# Altium PCB HANDS_FREE_ControlUnit_V1.PcbDoc (part 1 of 3)
Units mil, origin at the board's own origin, x right, y up, seen from the top; angles counter-clockwise.
Board outline 2372.03 x 3554.03 mil, 2 copper layers (Top Layer, Bottom Layer); 33 components, 66 nets, 337 pads, 84 vias.
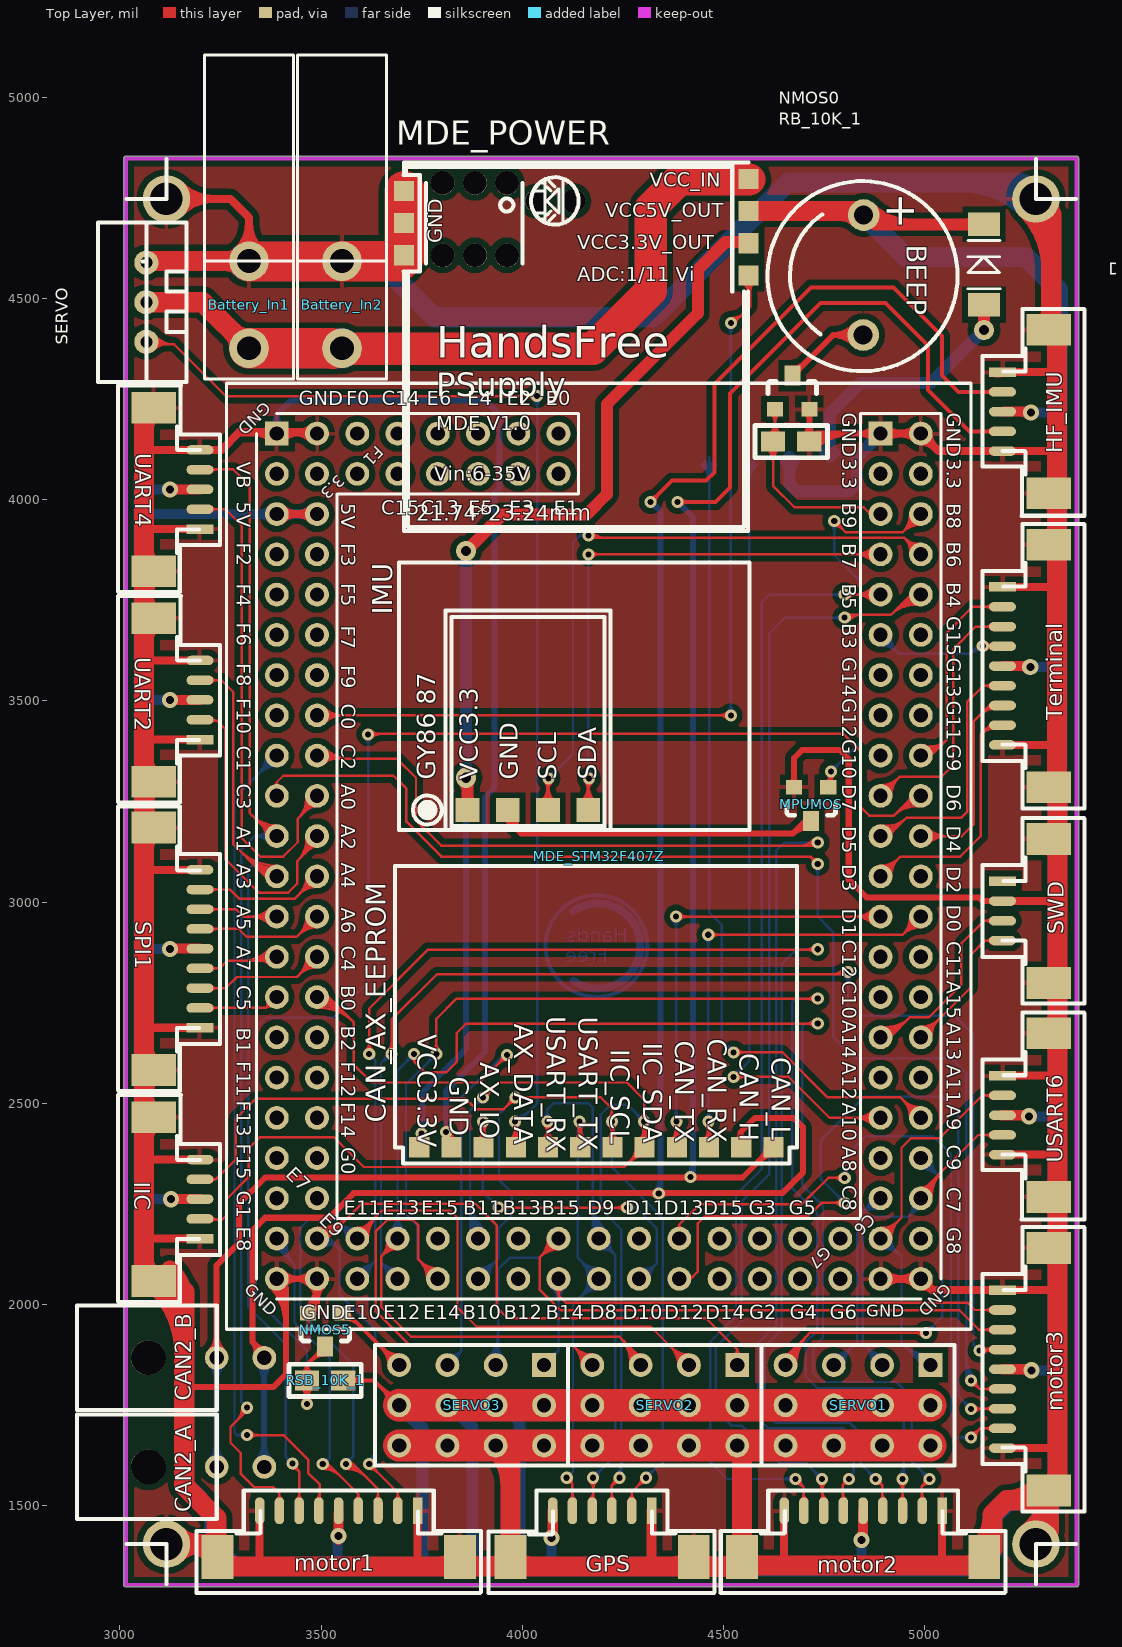
[diagram p0: Top Layer view]
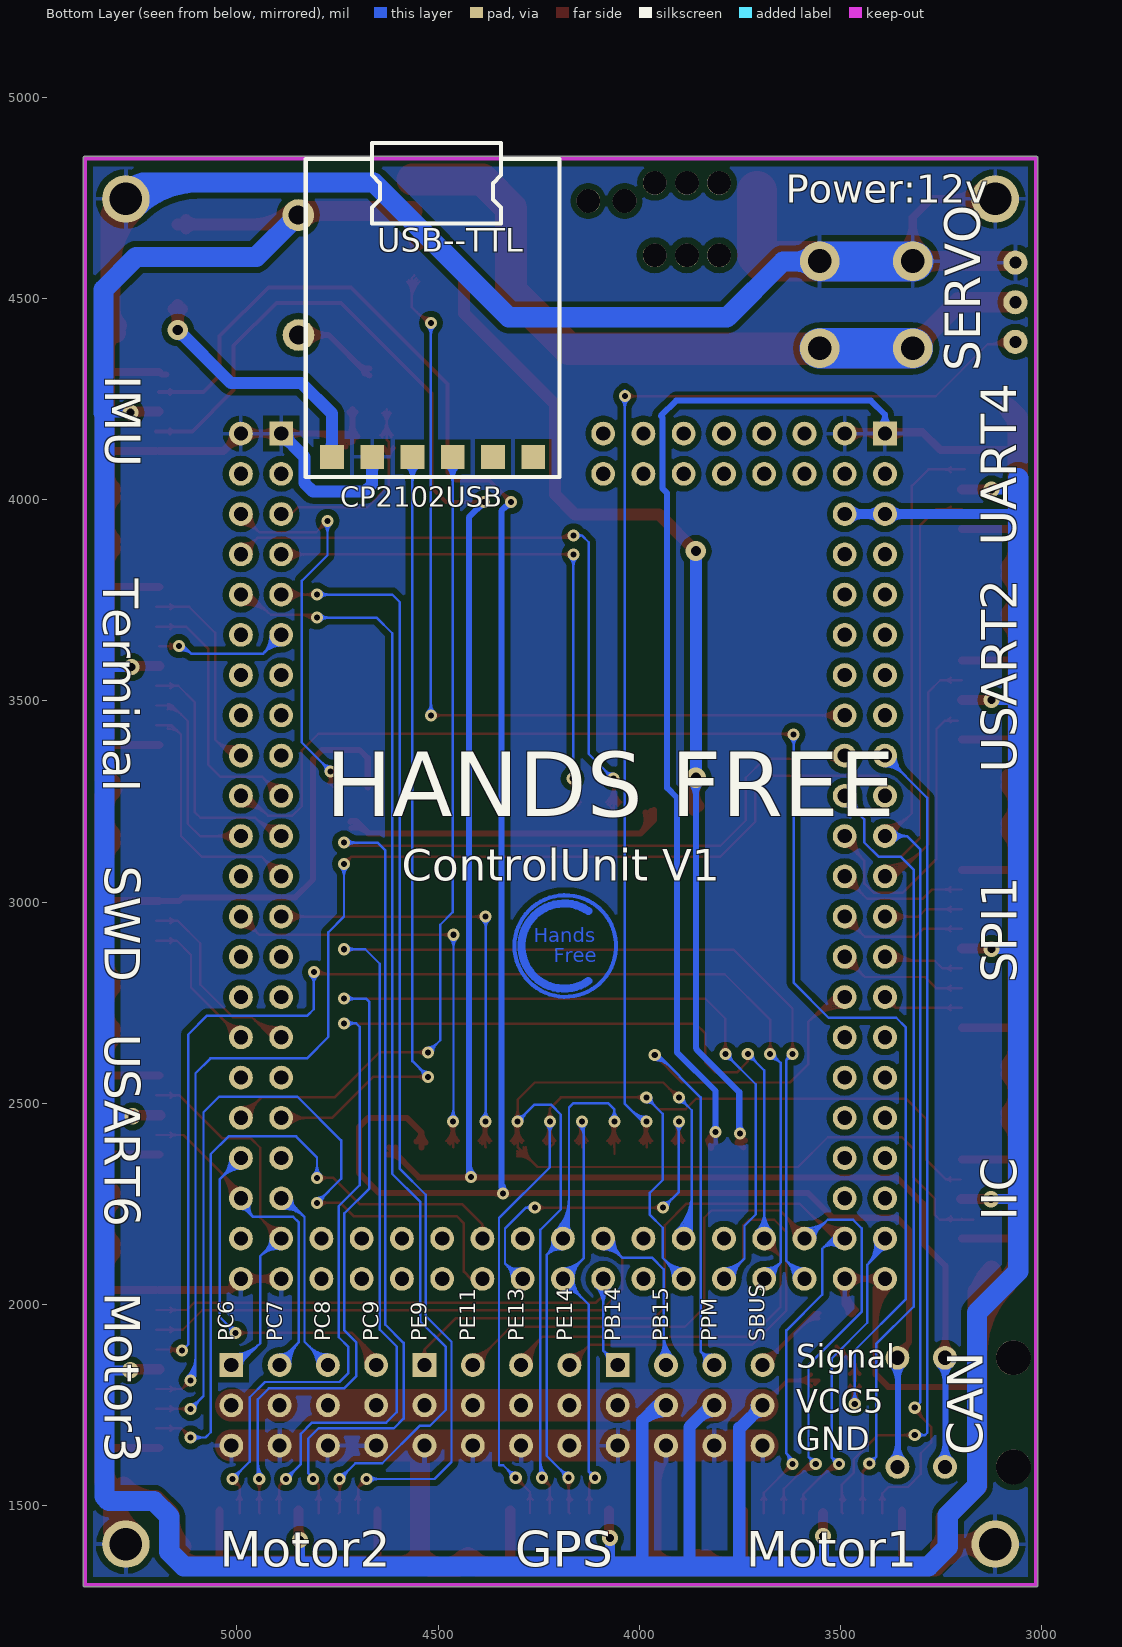
[diagram p1: Bottom Layer view, seen from below]

## Layer stack, top to bottom
Top Layer: signal copper 1.4
Dielectric: dielectric 12.6, FR-4, Dk 4.8
Bottom Layer: signal copper 1.4

## Board outline
3009.99,1304 3009.99,4845 cw(c3015,4845) 3010.21,4846.5 cw(c3015,4848) 3015,4853.02 5377,4853.02 cw(c5377,4848) 5382.02,4848 5382.02,1304 cw(c5377,1304) 5377,1298.98 3015,1298.98 cw(c3015,1304)

## Design rules (kind name [scope] priority, off if disabled: settings)
Clearance [All] p1: gap=8
ComponentClearance [All] p1 off: gap=10 collisioncheckmode=3 verticalgap=10 showdistances=FALSE
Height [All] p1 off: minheight=0 maxheight=1000 prefheight=500
PolygonConnect [All] p1: connectstyle=Relief reliefconductorwidth=10 reliefentries=4 polygonreliefangle="90 Angle"
RoutingVias [All] p1: holewidth=15 width=30 viastyle="Through Hole" minholewidth=15 minwidth=30 maxholewidth=100 maxwidth=200
SilkscreenOverComponentPads [All] p1: minsilkscreentomaskgap=10
SolderMaskExpansion [All] p1: expansion=4
Width [All] p1: maxlimit=100 minlimit=6 preferedwidth=6
25 further rules are at their usual default settings.

## Components (designator, comment, footprint, x,y, rotation, side; value= is the part's Value field where it differs from the comment)
Battery_In1 "HDR_Header_Power_2P" HDR_MOLEX_POWER5557_DH_2P 3321,4376 r90 top
Battery_In2 "HDR_Header_Power_2P" HDR_MOLEX_POWER5557_DH_2P 3552,4376 r90 top
BEEP "ELE_蜂鸣器12*X" ELE_蜂鸣器_D_12*X 4846,4558 r270 top
CAN2_A "HDR_HEADER_CAN_DH_2P" HDR_MOLEX_CANMX3.0_DH_2P 3359,1597 r180 top
CAN2_B "HDR_HEADER_CAN_DH_2P" HDR_MOLEX_CANMX3.0_DH_2P 3359,1868 r180 top
CAN_AX_EEPROM "MDE_CAN_AX_EEPROM" MDE_CAN_AX_EEPROM 4184,2751 r0 top
"ControlUnit V1" "LOGO" LOGO 4308,2906 r180 bottom (schematic designator ControlUnit)
CP2102USB "MDE_CP2102-TTLUSB" MDE_CP2102-TTLUSB_BASE 4264,4106 r270 bottom
D1 "1N4148" ELE_D1206 5247,4484 r90 top
GPS "HANDS_FREE_GPS" HDR_Molex_PH_1.25_6P 4321,1488 r180 top
HF_IMU "HANDS_FREE_IMU" HDR_Molex_PH_1.25_5P 5193,4317 r270 top
IIC "HANDS_FREE_IIC" HDR_Molex_PH_1.25_5P 3199,2164 r90 top
IMU "MDE_GY86_87" MDE_GY86_GY87_BASE 3694,3179 r90 top
MDE_POWER "MDE_POWERSupply_5.0V_3.3V" MDE_POWERSupply_5.0V_3.3V 3696,3922 r0 top
MDE_STM32F407Z "MDE_UNIT3-CORE_STM32F407ZG" MDE_UNIT3-CORE_STM32F407ZG 4190,3114.14 r270 top
motor1 "*MOTOR" HDR_Molex_PH_1.25_9P 3740,1488 r180 top
motor2 "*MOTOR" HDR_Molex_PH_1.25_9P 5043,1488 r180 top
motor3 "*MOTOR" HDR_Molex_PH_1.25_9P 5193,2036 r270 top
MPUMOS "SIS412DN" CHP_SOT23_P_3P 4760,3285 r180 top
NMOS0 "SIS412DN" CHP_SOT23_P_3P 4628,4225 r0 top
NMOS5 "SIS412DN" CHP_SOT23_P_3P 3553,1979 r180 top
RB_10K_1 "ELE_RES_1" ELE_0805_P 4713,4144 r180 top
RSB_10K_1 "ELE_RES_1" ELE_0805_P 3465.06,1812 r0 top
SERVO "HDR_Header_1*3" HDR_数字舵机接口_D 3066,4392 r180 top
SERVO1 "HDR_Header_4*3" HDR_Header_3.00_DV_3*4 5014,1850 r180 top
SERVO2 "HDR_Header_4*3" HDR_Header_3.00_DV_3*4 4534,1850 r180 top
SERVO3 "HDR_Header_4*3" HDR_Header_3.00_DV_3*4 4054,1850 r180 top
SPI1 "HANDS_FREE_SPI" HDR_Molex_PH_1.25_9P 3199,2688 r90 top
SWD "HANDS_FREE_SWD" HDR_Molex_PH_1.25_4P 5193,3052 r270 top
Terminal "HANDS_FREE_TERMINAL" HDR_Molex_PH_1.25_9P 5193,3783 r270 top
UART2 "HANDS_FREE_USART" HDR_Molex_PH_1.25_5P 3199,3404 r90 top
UART4 "HANDS_FREE_USART" HDR_Molex_PH_1.25_5P 3199,3927 r90 top
USART6 "HANDS_FREE_USART" HDR_Molex_PH_1.25_5P 5193,2569 r270 top

## Footprints (in the part's own frame and the unit in brackets; to place one, negate y for a bottom-side part, rotate by r counter-clockwise, add the part's x,y. Pads: shape width x height; smd on the part's side, far side on the other; paste and mask are expansions set on the pad)
CHP_SOT23_P_3P [mil]
  rect 40x36 smd: 1(0,0) 2(85,0)
  rect 40x50 smd: 3(43,83)
  silkscreen extent -18,39 103,69
ELE_0805_P [mil]
  rect 60x50 smd: 1(0,0) 2(90,0)
  silkscreen extent -45,-40 135,40
ELE_D1206 [mm]
  rect 1.5x2 smd: 1(0,2.54) 2(5.08,2.54)
  silkscreen extent 1.02,1.52 4.06,3.56
ELE_蜂鸣器_D_12*X [mm]
  round 2 hole 1.2: 1(-3.785,0.051) 2(3.785,0.025)
  silkscreen extent -5.93,-6.02 6.07,5.97
HDR_Header_3.00_DV_3*4 [mm] "Connector; Header; 10x2 Position"
  rect 1.5x1.5 hole 0.9: 1(0,0)
  round 1.5 hole 0.9: 2(0,2.54) 3(0,5.08) 4(3.048,0) 5(3.048,2.54) 6(3.048,5.08) 7(6.096,0) 8(6.096,2.54) 9(6.096,5.08) 10(9.144,0) 11(9.144,2.54) 12(9.144,5.08)
  silkscreen extent -1.52,-1.27 10.67,6.35
HDR_MOLEX_CANMX3.0_DH_2P [mm]
  round 1.5 hole 0.9: 1(0,0) 2(3,0)
  round 2.2 hole 2.2: 3(7.315,0)
  silkscreen extent 3,-3.3 11.81,3.3
HDR_Molex_PH_1.25_4P [mm]
  rect 0.6x1.7 smd: 1(0,0)
  oval 0.6x1.7 smd: 2(1.25,0) 3(2.5,0) 4(3.745,0)
  rect 2x2.8 smd: 5(-2.667,2.921) 6(6.417,2.921)
  silkscreen extent -3.99,-1.27 7.72,5.18
HDR_Molex_PH_1.25_5P [mm]
  rect 0.6x1.7 smd: 1(0,0)
  oval 0.6x1.7 smd: 2(1.25,0) 3(2.5,0) 4(3.745,0) 5(4.989,0)
  rect 2x2.8 smd: 6(-2.667,2.921) 7(7.656,2.921)
  silkscreen extent -3.99,-1.27 9.07,5.18
HDR_Molex_PH_1.25_6P [mm]
  rect 0.6x1.7 smd: 1(0,0)
  oval 0.6x1.7 smd: 2(1.25,0) 3(2.5,0) 4(3.745,0) 5(4.989,0) 6(6.234,0)
  rect 2x2.8 smd: 7(-2.667,2.921) 8(8.901,2.921)
  silkscreen extent -3.99,-1.27 10.29,5.18
HDR_Molex_PH_1.25_9P [mm]
  rect 0.6x1.7 smd: 1(0,0)
  oval 0.6x1.7 smd: 2(1.25,0) 3(2.5,0) 4(3.745,0) 5(4.989,0) 6(6.234,0) 7(7.478,0) 8(8.723,0) 9(9.968,0)
  rect 2x2.8 smd: 10(-2.667,2.921) 11(12.635,2.921)
  silkscreen extent -3.99,-1.27 13.97,5.18
HDR_MOLEX_POWER5557_DH_2P [mm]
  round 2.5 hole 1.5: 1(0,0) 2(5.5,0)
  silkscreen extent -1.95,-2.8 18.5,2.8
HDR_数字舵机接口_D [mil]
  round 60 hole 30: 1(0,0) 2(0,-98.43) 3(0,-196.85)
  silkscreen extent -100,-297 120,100
LOGO [mil]
  Top Layer circle w10: c123.81,-15 r126.19
  Top Layer lines w20: 181.29,71.7 ccw(c120.7,-15.05) 180.87,-102.09
MDE_CAN_AX_EEPROM [mil]
  rect 50x50 smd: 1(440,-360) 2(360,-360) 3(280,-360) 4(200,-360) 5(120,-360) 6(40,-360) 7(-40,-360) 8(-120,-360) 9(-200,-360) 10(-280,-360) 11(-360,-360) 12(-440,-360)
  silkscreen extent -500,-400 498,339
MDE_CP2102-TTLUSB_BASE [mil]
  rect 59x59 smd: 1(0,0) 2(0,-100) 3(0,-200) 4(0,-300) 5(0,-400) 6(0,-500)
  silkscreen extent -780,-565 50,65
MDE_GY86_GY87_BASE [mil]
  rect 59x59 smd: 1(50,-170) 2(50,-270) 3(50,-370) 4(50,-470)
  silkscreen extent 0,-870 665,0
MDE_POWERSupply_5.0V_3.3V [mil]
  round 59.06 hole 59.06: 0(106,685) 0(106,865) 0(186,685) 0(186,865) 0(266,685) 0(266,865) 0(341,820) 0(431,820)
  rect 50x50 smd: 1(866,875) 2(866,795) 3(866,715) 4(866,635) 5(10,685) 5(10,765) 5(10,845)
  silkscreen extent 9,0 866,915
MDE_UNIT3-CORE_STM32F407ZG [mm]
  round 1.5 hole 0.9: 1(-26.67,-5.08) 2(-24.13,-5.08) 3(-26.67,-7.62) 4(-24.13,-7.62) 5(-26.67,-10.16) 6(-24.13,-20.32) 7(-24.13,-10.16) 8(-26.67,-12.7) 9(-24.13,-12.7) 10(-26.67,-15.24) 11(-24.13,-15.24) 12(-19.05,-20.32) 13(-19.05,-17.78) 14(-16.51,-20.32) 15(-16.51,-17.78) 18(-13.97,-20.32) 19(-13.97,-17.78) 20(-11.43,-20.32) 21(-11.43,-17.78) 22(-8.89,-20.32) 26(-8.89,-17.78) 27(-6.35,-20.32) 28(-6.35,-17.78) 29(-3.81,-20.32) 34(-3.81,-17.78) 35(-1.27,-20.32) 36(-1.27,-17.78) 37(1.27,-20.32) 40(1.27,-17.78) 41(3.81,-20.32) 42(3.81,-17.78) 43(6.35,-20.32) 44(6.35,-17.78) 45(8.89,-20.32) 46(8.89,-17.78) 47(11.43,-20.32) 48(11.43,-17.78) 49(13.97,-20.32) 50(13.97,-17.78) 53(16.51,-20.32) 54(16.51,-17.78) 55(19.05,-20.32) 56(19.05,-17.78) 57(21.59,-20.32) 58(21.59,-17.78) 59(24.13,-20.32) 60(24.13,-17.78) 63(26.67,-15.24) 64(24.13,-15.24) 65(26.67,-12.7) 66(24.13,-12.7) 67(26.67,-10.16) 68(24.13,-10.16) 69(26.67,-7.62) 70(24.13,-7.62) 73(26.67,-5.08) 74(24.13,-5.08) 75(26.67,-2.54) 76(24.13,-2.54) 77(26.67,0) 78(24.13,0) 79(26.67,2.54) 80(24.13,2.54) 81(26.67,5.08) 82(24.13,5.08) 85(26.67,7.62) 86(24.13,7.62) 87(26.67,10.16) 88(24.13,10.16) 89(26.67,12.7) 90(24.13,12.7) 91(26.67,15.24) 92(24.13,15.24) 93(24.13,20.32) 96(24.13,17.78) 97(21.59,20.32) 98(21.59,17.78) 99(19.05,20.32) 100(19.05,17.78) 101(16.51,20.32) 102(16.51,17.78) 103(13.97,20.32) 104(13.97,17.78) 105(11.43,20.32) 109(11.43,17.78) 110(8.89,20.32) 111(8.89,17.78) 112(6.35,20.32) 113(6.35,17.78) 114(3.81,20.32) 115(3.81,17.78) 116(1.27,20.32) 117(1.27,17.78) 118(-1.27,20.32) 119(-1.27,17.78) 122(-3.81,20.32) 123(-3.81,17.78) 124(-6.35,20.32) 125(-6.35,17.78) 126(-8.89,20.32) 127(-8.89,17.78) 128(-11.43,20.32) 129(-11.43,17.78) 132(-13.97,20.32) 133(-13.97,17.78) 134(-16.51,20.32) 135(-16.51,17.78) 136(-19.05,20.32) 137(-19.05,17.78) 139(-21.59,20.32) 140(-21.59,17.78) 141(-26.67,-2.54) 142(-24.13,-2.54) 200(-21.59,-17.78) 201(-21.59,-20.32) 202(-24.13,20.32) 203(-24.13,17.78) 206(-26.67,-17.78) 207(-24.13,-17.78) 210(26.67,-20.32) 211(26.67,-17.78) 212(26.67,17.78) 213(26.67,20.32) 214(-26.67,20.32)
  rect 1.5x1.5 hole 0.9: 208(-26.67,-20.32) 215(-26.67,17.78)
  silkscreen extent -29.85,-23.5 29.85,23.5

## Part data
BEEP: library part E
CP2102USB: "CP2102Ä£¿é£"
D1: library part ELE_Diode, "二?"
IMU: "IMUģ?"
motor1 motor2 motor3: library part HANDS_FREE_MOTOR
MPUMOS NMOS0 NMOS5: library part ELE_NMOS_1, "MOS管"
RB_10K_1 RSB_10K_1: "电?"

## Free pads (board coordinates)
  round 118.11 hole 80.71: 1(3116,4747) 2(5276,4747) 3(5276,1405) 4(3116,1405)

## Via types
v1: diameter 30, hole 15, Top Layer to Bottom Layer, 70 vias
v2: diameter 40, hole 20, Top Layer to Bottom Layer, 11 vias
v3: diameter 50, hole 25, Top Layer to Bottom Layer, 3 vias

## Nets (pads, with @x,y where several pads share a name; then routed paths per layer and width w, separated by ;. In a path a pad name is that pad's centre, name@x,y a point inside that pad or via, vN(x,y) a via of type N, cw(c..) or ccw(c..) an arc to the next point about the centre after c; other vN are vias at no path point)
ADC_IN_POWER: MDE_POWER.4 MDE_STM32F407Z.26 | length 2771.3
  Top Layer w6: MDE_STM32F407Z.26@3490,3464.14 4516.14,3464.14 v1@4518,3466 ; MDE_STM32F407Z.26@3500.27,3453.87 cw(c3525.07,3429.07) 3525.07,3464.14 cw(c3525.07,3499.21) MDE_STM32F407Z.26@3500.27,3474.41 ; MDE_STM32F407Z.26@3504.52,3449.62 cw(c3539.56,3414.58) 3539.56,3464.14 cw(c3539.56,3513.7) MDE_STM32F407Z.26@3504.52,3478.65 ; MDE_STM32F407Z.26@3508.76,3445.38 cw(c3554.04,3400.09) 3554.04,3464.14 cw(c3554.04,3528.18) MDE_STM32F407Z.26@3508.76,3482.9 ; 4488.7,3464.14 cw(c4488.7,3434.7) v1@4509.51,3455.51 ; 4489.36,3464.14 ccw(c4489.36,3492.64) v1@4509.51,3472.49 ; v1@4518,4431 4566,4479 4566,4550 MDE_POWER.4@4559,4557 ; v1@4518,4445 ccw(c4518,4478.8) 4541.9,4454.9 ; v1@4518,4451 ccw(c4518,4499.28) 4552.14,4465.14 ; v1@4530,4439 cw(c4539.66,4439) 4532.83,4445.83 ; MDE_POWER.4@4546.44,4541.44 cw(c4499.23,4494.23) 4566,4494.23 ; MDE_POWER.4@4550.69,4545.69 cw(c4513.72,4508.72) 4566,4508.72 ; MDE_POWER.4@4554.93,4549.93 cw(c4528.2,4523.2) 4566,4523.2 ; 4566,4513.54 cw(c4605.46,4513.54) MDE_POWER.4@4577.56,4541.44 ; 4566,4528.03 cw(c4590.97,4528.03) MDE_POWER.4@4573.31,4545.69
  Bottom Layer w6: v1@4509.51,3472.49 ccw(c4489.03,3492.97) 4518,3492.97 ccw(c4546.97,3492.97) v1@4526.49,3472.49 ; v1@4509.51,4430.51 cw(c4489.03,4410.03) 4518,4410.03 cw(c4546.97,4410.03) v1@4526.49,4430.51 ; v1@4516,3462 v1(4518,3464) v1(4518,4439)
AX_DATA: CAN_AX_EEPROM.9 SERVO.1 | length 3628.6
  Top Layer w6: SERVO.1@3060,4386 3135,4386 ; SERVO.1@3073.01,4397.65 ccw(c3097.36,4417.29) 3097.36,4386 ; SERVO.1@3077.68,4401.41 ccw(c3109.91,4427.4) 3109.91,4386 ; SERVO.1@3080.85,4377.15 cw(c3102.21,4355.79) 3102.21,4386 ; SERVO.1@3082.35,4405.18 ccw(c3122.45,4437.52) 3122.45,4386 ; SERVO.1@3085.09,4372.91 cw(c3116.7,4341.3) 3116.7,4386 ; SERVO.1@3087.02,4408.95 ccw(c3135,4447.63) 3135,4386 ; CAN_AX_EEPROM.9@3968.44,2406.56 ccw(c3935.37,2439.63) 3982.14,2439.63 ; CAN_AX_EEPROM.9@3972.69,2402.31 ccw(c3949.86,2425.14) 3982.14,2425.14 ; v1@3973.66,2446.51 cw(c3953.17,2426.03) 3982.14,2426.03 cw(c4011.11,2426.03) v1@3990.63,2446.51 ; v1@3975.77,2444.83 cw(c3962.99,2424.43) 3986.46,2429.82 ; CAN_AX_EEPROM.9@3982,2391 3982.14,2391.14 v1(3982.14,2455) ; 3982.14,2419.63 ccw(c4012.63,2419.63) CAN_AX_EEPROM.9@3991.07,2398.07 ; 3982.14,2434.11 ccw(c4027.11,2434.11) CAN_AX_EEPROM.9@3995.31,2402.31 ; v1@3982.14,2448.6 ccw(c4041.6,2448.6) CAN_AX_EEPROM.9@3999.56,2406.56 ; 3984.45,2438.55 cw(c4000.17,2442.16) v1@3987.03,2451.52 ; 3987.44,2425.54 cw(c4014.73,2431.8) v1@3991.92,2448.04 ; v1@4027.51,4248.51 ccw(c4007.03,4228.03) 4007.03,4257 ccw(c4007.03,4285.97) v1@4027.51,4265.49 ; v1(4036,4257) 3264,4257 3135,4386
  Bottom Layer w6: v1@3982.14,2461 ccw(c3982.14,2499.28) 4009.21,2472.21 ; v1@3982.14,2467 ccw(c3982.14,2519.77) 4019.46,2482.46 ; 3998.97,2461.97 cw(c3982.14,2478.8) v1(3982.14,2455) 3992,2455 4037,2500 4037,4272 ; v1@4027.51,4248.51 cw(c4004.62,4225.62) 4037,4225.62 ; v1@4031.76,4252.76 cw(c4019.1,4240.1) 4037,4240.1 ; 4037,4230.44 cw(c4062.56,4230.44) v1@4044.49,4248.51
AX_IO: CAN_AX_EEPROM.10 MDE_STM32F407Z.79 | length 1506.9
  Top Layer w6: CAN_AX_EEPROM.10@3888.44,2406.56 ccw(c3855.72,2439.28) 3902,2439.28 ; CAN_AX_EEPROM.10@3892.69,2402.31 ccw(c3870.2,2424.8) 3902,2424.8 ; v1@3893.51,2446.51 cw(c3873.03,2426.03) 3902,2426.03 cw(c3930.97,2426.03) v1@3910.49,2446.51 ; v1@3895.64,2444.82 cw(c3882.75,2424.2) 3906.45,2429.67 ; CAN_AX_EEPROM.10@3902,2391 v1(3902,2455) ; 3902,2419.97 ccw(c3932.97,2419.97) CAN_AX_EEPROM.10@3911.07,2398.07 ; 3902,2434.46 ccw(c3947.46,2434.46) CAN_AX_EEPROM.10@3915.31,2402.31 ; v1@3902,2448.94 ccw(c3961.94,2448.94) CAN_AX_EEPROM.10@3919.56,2406.56 ; 3904.4,2438.55 cw(c3920.31,2442.22) v1@3906.92,2451.57 ; 3907.44,2425.39 cw(c3935.23,2431.81) v1@3911.84,2448.13 ; v1(3941,2241) v1(4260,2241) ; v1@3949.49,2232.51 cw(c3969.97,2212.03) 3969.97,2241 cw(c3969.97,2269.97) v1@3949.49,2249.49 ; v1@4251.51,2232.51 ccw(c4231.03,2212.03) 4231.03,2241 ccw(c4231.03,2269.97) v1@4251.51,2249.49
  Bottom Layer w6: v1@3893.51,2446.51 cw(c3873.03,2426.03) 3902,2426.03 cw(c3930.97,2426.03) v1@3910.49,2446.51 ; v1(3902,2455) 3902,2280 v1(3941,2241) ; v1@3929,2241 ccw(c3900.03,2241) 3920.51,2261.49 ccw(c3941,2281.97) v1@3941,2253 ; v1(4260,2241) 4282,2241 ; v1@4270.09,2234.5 cw(c4282,2226.84) 4282,2241 ; v1@4270.09,2247.5 ccw(c4282,2255.16) 4282,2241 ; MDE_STM32F407Z.79@4290,2064.14 4296.14,2064.14 4334,2102 ; MDE_STM32F407Z.79@4292.81,2078.39 ccw(c4298.23,2105.94) 4318.09,2086.09 ; MDE_STM32F407Z.79@4293.97,2084.28 ccw(c4300.85,2119.23) 4326.04,2094.04 ; MDE_STM32F407Z.79@4295.13,2090.17 ccw(c4303.47,2132.53) 4334,2102 ; MDE_STM32F407Z.79@4310.53,2064.14 cw(c4345.27,2064.14) 4320.7,2088.7 ; MDE_STM32F407Z.79@4316.53,2064.14 cw(c4365.75,2064.14) 4330.95,2098.95 ; 4282,2241 4334,2189 4334,2102
BEEP: MDE_STM32F407Z.140 NMOS0.1 RB_10K_1.2 | length 894.9
  Top Layer w6: RB_10K_1.2@4607.44,4128.44 cw(c4569.89,4090.89) 4623,4090.89 cw(c4676.11,4090.89) RB_10K_1.2@4638.56,4128.44 ; RB_10K_1.2@4611.69,4132.69 cw(c4584.37,4105.37) 4623,4105.37 cw(c4661.63,4105.37) RB_10K_1.2@4634.31,4132.69 ; RB_10K_1.2@4612.44,4159.56 ccw(c4574.89,4197.11) 4628,4197.11 ccw(c4681.11,4197.11) RB_10K_1.2@4643.56,4159.56 ; RB_10K_1.2@4616.69,4155.31 ccw(c4589.37,4182.63) 4628,4182.63 ccw(c4666.63,4182.63) RB_10K_1.2@4639.31,4155.31 ; NMOS0.1@4617.39,4214.39 cw(c4591.79,4188.79) 4628,4188.79 cw(c4664.21,4188.79) NMOS0.1@4638.61,4214.39 ; NMOS0.1@4621.64,4218.64 cw(c4606.27,4203.27) 4628,4203.27 cw(c4649.73,4203.27) NMOS0.1@4634.36,4218.64 ; NMOS0.1@4628,4225 4628,4149 RB_10K_1.2@4623,4144 4623,4034 4676,3981 4848,3981 4864.86,3964.14 MDE_STM32F407Z.140@4890,3964.14
  Bottom Layer w6: MDE_STM32F407Z.140@4871.14,3983 MDE_STM32F407Z.140@4890,3964.14
CAN1_H: CAN2_A.1 CAN2_B.1 CAN_AX_EEPROM.2 HF_IMU.2 | length 5949.3
  Top Layer w10: v1(4319,3994) 4372,4047 4456,4047 4477,4068 4477,4287 4717,4527 4922,4527 5043,4406 5043,4308 5083.21,4267.79 HF_IMU.2@5193,4267.79 ; v1@4319,4004 ccw(c4319,4028.14) 4336.07,4011.07 ccw(c4353.14,3994) v1@4329,3994 ; HF_IMU.2@5166.53,4262.97 ccw(c5154.9,4251.34) 5154.9,4267.79 ccw(c5154.9,4284.23) HF_IMU.2@5166.53,4272.6
  Top Layer w15: CAN2_B.1@3337.98,1874.57 ccw(c3307.2,1884.2) 3330,1907 ; 3338.47,1898.53 ccw(c3359,1919.06) CAN2_B.1@3359,1890.03 ; CAN2_B.1@3358,1879 3330,1907 ; 4318.48,2277 cw(c4318.48,2255.48) v1@4333.7,2270.7 ; 4323.31,2277 ccw(c4323.31,2291.69) v1@4333.7,2281.3 ; v1@4344.3,2270.7 cw(c4359.52,2255.48) 4359.52,2277 ; v1@4344.3,2281.3 ccw(c4354.69,2291.69) 4354.69,2277 ; CAN_AX_EEPROM.2@4531.73,2403.47 ccw(c4507.59,2428) 4542,2428 ; CAN_AX_EEPROM.2@4542,2391 4542,2428 ; CAN_AX_EEPROM.2@4553.89,2405.44 cw(c4569.35,2428) 4542,2428 ; 3330,1907 3330,2185 3361,2216 3520,2216 3581,2277 4646,2277 4697,2328 4697,2441 4674,2464 4578,2464 4542,2428
  Bottom Layer w15: CAN2_A.1@3343.42,1612.58 ccw(c3308.24,1647.76) 3358,1647.76 ; CAN2_B.1@3343.42,1852.42 cw(c3308.24,1817.24) 3358,1817.24 ; CAN2_A.1@3358,1608 CAN2_B.1@3358,1879 ; 3358,1652.59 ccw(c3414.59,1652.59) CAN2_A.1@3374.58,1612.58 ; 3358,1812.41 cw(c3414.59,1812.41) CAN2_B.1@3374.58,1852.42 ; v1@4319,3986.5 cw(c4319,3963.57) 4335.22,3979.78 ; v1@4319,3996 4343,3972 4343,2297 ; v1@4333.7,2281.3 ccw(c4311.24,2303.76) 4343,2303.76 ; v1@4333.94,2281.54 ccw(c4323.49,2293) 4339,2293 ; v1@4334.96,2282.32 ccw(c4325.58,2297) 4343,2297 ; v1(4339,2276) 4339,2293 ; v1@4344.06,2281.54 cw(c4354.51,2293) 4339,2293 ; 4339,2293 4343,2297
CAN1_L: CAN2_A.2 CAN2_B.2 CAN_AX_EEPROM.1 HF_IMU.4 | length 5596.3
  Top Layer w10: v1(4386,3994) 4480,3994 4516,4030 4516,4264 4741,4489 4902,4489 5008,4383 5008,4272 5110.43,4169.57 HF_IMU.4@5201,4169.57 ; v1@4393.07,3986.93 cw(c4410.14,3969.86) 4410.14,3994 cw(c4410.14,4018.14) v1@4393.07,4001.07 ; HF_IMU.4@5166.53,4164.76 ccw(c5154.9,4153.13) 5154.9,4169.57 ccw(c5154.9,4186.02) HF_IMU.4@5166.53,4174.39
  Top Layer w15: CAN2_B.2@3225.31,1883.58 ccw(c3190.12,1918.76) 3239.89,1918.76 ; CAN2_B.2@3239.89,1879 3239.89,2096.89 3296,2153 3296,2251 3361,2316 4547,2316 CAN_AX_EEPROM.1@4622,2391 ; 3239.89,1923.59 ccw(c3296.48,1923.59) CAN2_B.2@3256.47,1883.58 ; 4397.48,2316 ccw(c4397.48,2337.52) v1@4412.7,2322.3 ; 4402.31,2316 cw(c4402.31,2301.31) v1@4412.7,2311.7 ; v1@4423.3,2311.7 cw(c4433.69,2301.31) 4433.69,2316 ; v1@4423.3,2322.3 ccw(c4438.52,2337.52) 4438.52,2316 ; 4590.71,2359.71 cw(c4624,2326.42) CAN_AX_EEPROM.1@4624,2373.5 ; 4595.54,2364.54 ccw(c4569.08,2391) CAN_AX_EEPROM.1@4606.5,2391
  Bottom Layer w15: CAN2_A.2@3225.31,1612.58 ccw(c3190.12,1647.76) 3239.89,1647.76 ; CAN2_B.2@3225.31,1852.42 cw(c3190.12,1817.24) 3239.89,1817.24 ; CAN2_A.2@3239.89,1608 CAN2_B.2@3239.89,1879 ; 3239.89,1652.59 ccw(c3296.48,1652.59) CAN2_A.2@3256.47,1612.58 ; 3239.89,1812.41 cw(c3296.48,1812.41) CAN2_B.2@3256.47,1852.42 ; v1@4386,3986.5 cw(c4386,3968.39) 4398.8,3981.2 cw(c4411.61,3994) v1@4393.5,3994 ; v1(4386,3994) 4424,3956 4424,2327 4418,2321 v1(4418,2317) ; v1@4412.7,2322.3 ccw(c4385.41,2349.59) 4424,2349.59
CAN1_RX: CAN_AX_EEPROM.3 MDE_STM32F407Z.114 | length 1771
  Top Layer w6: CAN_AX_EEPROM.3@4448.44,2406.56 ccw(c4413.3,2441.7) v1@4463,2441.7 ; CAN_AX_EEPROM.3@4452.69,2402.31 ccw(c4427.79,2427.21) 4463,2427.21 ; v1@4454.51,2446.51 cw(c4434.03,2426.03) 4463,2426.03 cw(c4491.97,2426.03) v1@4471.48,2446.51 ; v1@4454.73,2446.31 cw(c4441.44,2432.34) 4460.34,2428.52 ; v1@4456.56,2444.88 cw(c4444.38,2425.73) 4466.53,2430.65 ; v1@4458.86,2450.65 cw(c4450.28,2441.63) 4462.49,2439.16 ; 4461.1,2432.32 cw(c4480.68,2428.36) v1@4469.64,2445 ; CAN_AX_EEPROM.3@4462,2391 4463,2392 v1(4463,2455) ; v1(4462,2919) 4944.86,2919 ; 4463,2417.56 ccw(c4490.56,2417.56) CAN_AX_EEPROM.3@4471.07,2398.07 ; 4463,2432.04 ccw(c4505.04,2432.04) CAN_AX_EEPROM.3@4475.31,2402.31 ; v1@4463,2446.53 ccw(c4519.53,2446.53) CAN_AX_EEPROM.3@4479.56,2406.56 ; 4464.75,2438.63 cw(c4479.38,2441.89) v1@4467.68,2451.25 ; 4467.47,2426.41 cw(c4491.92,2431.85) v1@4472.37,2447.5 ; v1@4470.49,2910.51 cw(c4490.97,2890.03) 4490.97,2919 cw(c4490.97,2947.97) v1@4470.49,2927.49 ; MDE_STM32F407Z.114@4963.47,2964.08 cw(c4899.94,2963.93) 4944.87,2919 ; MDE_STM32F407Z.114@4969.47,2964.09 cw(c4920.31,2963.97) 4955.07,2929.21 cw(c4989.84,2894.45) MDE_STM32F407Z.114@4989.95,2943.61 ; MDE_STM32F407Z.114@4975.47,2964.1 cw(c4940.68,2964.02) 4965.28,2939.42 cw(c4989.88,2914.82) MDE_STM32F407Z.114@4989.97,2949.61 ; MDE_STM32F407Z.114@4989.94,2937.61 ccw(c4989.79,2874.08) 4944.87,2919 ; MDE_STM32F407Z.114@4990,2964.14 4944.86,2919
  Bottom Layer w6: v1@4453.51,2910.51 cw(c4433.03,2890.03) 4462,2890.03 cw(c4490.97,2890.03) v1@4470.49,2910.51 ; v1@4454.51,2463.49 ccw(c4436.44,2481.56) 4462,2481.56 ; 4462,2471.9 ccw(c4479.9,2471.9) v1@4467.24,2459.24 ; 4462,2486.38 ccw(c4494.38,2486.38) v1@4471.48,2463.49 ; v1(4462,2919) 4462,2456 v1(4463,2455)
CAN1_TX: CAN_AX_EEPROM.4 MDE_STM32F407Z.115 | length 1778.6
  Top Layer w6: CAN_AX_EEPROM.4@4368.44,2406.56 ccw(c4333.65,2441.35) v1@4382.86,2441.35 ; CAN_AX_EEPROM.4@4372.69,2402.31 ccw(c4348.13,2426.87) 4382.86,2426.87 ; v1@4374.37,2446.51 cw(c4353.89,2426.03) 4382.86,2426.03 cw(c4411.83,2426.03) v1@4391.34,2446.51 ; v1@4374.67,2446.23 cw(c4361.77,2432.39) 4380.31,2428.67 ; v1@4376.43,2444.87 cw(c4364.15,2425.52) 4386.51,2430.52 ; v1@4378.76,2450.61 cw(c4370.39,2441.63) 4382.43,2439.22 ; 4381.07,2432.42 cw(c4400.49,2428.52) v1@4389.51,2445.01 ; CAN_AX_EEPROM.4@4382,2391 4382.86,2391.86 v1(4382.86,2455) ; v1(4382,2964.14) MDE_STM32F407Z.115@4890,2964.14 ; 4382.86,2417.9 ccw(c4410.9,2417.9) CAN_AX_EEPROM.4@4391.07,2398.07 ; 4382.86,2432.39 ccw(c4425.39,2432.39) CAN_AX_EEPROM.4@4395.31,2402.31 ; v1@4382.86,2446.87 ccw(c4439.87,2446.87) CAN_AX_EEPROM.4@4399.56,2406.56 ; 4384.7,2438.61 cw(c4399.51,2441.93) v1@4387.58,2451.3 ; 4387.47,2426.27 cw(c4412.37,2431.83) v1@4392.3,2447.59 ; v1@4390.49,2955.65 cw(c4410.97,2935.17) 4410.97,2964.14 cw(c4410.97,2993.11) v1@4390.49,2972.62 ; MDE_STM32F407Z.115@4871.24,2945.38 ccw(c4825.96,2900.09) 4825.96,2964.14 ccw(c4825.96,3028.18) MDE_STM32F407Z.115@4871.24,2982.9 ; MDE_STM32F407Z.115@4875.48,2949.62 ccw(c4840.44,2914.58) 4840.44,2964.14 ccw(c4840.44,3013.7) MDE_STM32F407Z.115@4875.48,2978.65 ; MDE_STM32F407Z.115@4879.73,2953.87 ccw(c4854.93,2929.07) 4854.93,2964.14 ccw(c4854.93,2999.21) MDE_STM32F407Z.115@4879.73,2974.41
  Bottom Layer w6: v1@4373.51,2955.65 cw(c4353.03,2935.17) 4382,2935.17 cw(c4410.97,2935.17) v1@4390.49,2955.65 ; v1@4374.37,2463.49 ccw(c4355.95,2481.9) 4382,2481.9 ; 4382,2471.55 ccw(c4399.41,2471.55) v1@4387.1,2459.24 ; 4382,2486.04 ccw(c4413.9,2486.04) v1@4391.34,2463.49 ; v1(4382,2964.14) 4382,2455.86 v1(4382.86,2455)
GND_CHIP: Battery_In1.2 Battery_In2.2 CAN_AX_EEPROM.11 CP2102USB.5 GPS.1 GPS.7 GPS.8 HF_IMU.1 HF_IMU.5 HF_IMU.6 HF_IMU.7 IIC.1 IIC.5 IIC.6 IIC.7 MDE_POWER.5 MDE_STM32F407Z.206 MDE_STM32F407Z.208 MDE_STM32F407Z.210 MDE_STM32F407Z.211 MDE_STM32F407Z.212 MDE_STM32F407Z.213 MDE_STM32F407Z.214 MDE_STM32F407Z.215 motor1.1 motor1.9 motor1.10 motor1.11 motor2.1 motor2.9 motor2.10 motor2.11 motor3.1 motor3.9 motor3.10 motor3.11 MPUMOS.2 NMOS0.2 NMOS5.2 pad.1 pad.2 pad.3 pad.4 RB_10K_1.1 SERVO1.3 SERVO1.6 SERVO1.9 SERVO1.12 SERVO2.3 SERVO2.6 SERVO2.9 SERVO2.12 SERVO3.3 SERVO3.6 SERVO3.9 SERVO3.12 SERVO.3 SPI1.1 SPI1.9 SPI1.10 SPI1.11 SWD.2 SWD.5 SWD.6 Terminal.1 Terminal.9 Terminal.10 Terminal.11 UART2.1 UART2.5 UART2.6 UART2.7 UART4.1 UART4.5 UART4.6 UART4.7 USART6.1 USART6.5 USART6.6 USART6.7 | length 29093
  Top Layer w10: RB_10K_1.1@4713,4144 RB_10K_1.1@4716,4141 ; MDE_STM32F407Z.215@4889.86,4164 MDE_STM32F407Z.215@4890,4164.14
  Top Layer w15: 3060,2165 3061,2164 ; 3060,2367 3066.57,2360.43 ; 3160,1812 3176,1796 3382,1796 3413,1827 3413,2041.14 ; 3339,1350 3347.57,1358.57 ; MDE_STM32F407Z.210@3374.42,2048.56 cw(c3281.29,1955.43) 3413,1955.43 ; MDE_STM32F407Z.210@3385.03,2059.17 cw(c3317.51,1991.64) 3413,1991.64 ; MDE_STM32F407Z.210@3395.64,2069.78 cw(c3353.72,2027.86) 3413,2027.86 ; MDE_STM32F407Z.210@3398.68,2043.89 cw(c3403.81,2031.95) 3413,2041.14 ; MDE_STM32F407Z.210@3405.58,2048.56 cw(c3443.18,2010.96) 3443.18,2064.14 cw(c3443.18,2117.32) MDE_STM32F407Z.210@3405.58,2079.71 ; MDE_STM32F407Z.210@3410.24,2055.46 ccw(c3422.19,2050.33) 3413,2041.14 ; NMOS5.2@3462.58,1986.42 ccw(c3396.37,2052.63) MDE_STM32F407Z.211@3490,2052.63 ; NMOS5.2@3468,1979 3490,2001 MDE_STM32F407Z.211@3490,2064.14 MDE_STM32F407Z.210@3390,2064.14 3413,2041.14 ; NMOS5.2@3470,1989.5 ccw(c3470,2010.02) NMOS5.2@3484.51,1995.51 ; NMOS5.2@3473.18,1975.82 ccw(c3432.58,2016.42) 3490,2016.42 ; MDE_STM32F407Z.211@3474.42,2079.71 cw(c3436.82,2117.32) 3436.82,2064.14 cw(c3436.82,2010.96) 3474.42,2048.56 cw(c3436.82,2010.96) 3490,2010.96 cw(c3543.18,2010.96) MDE_STM32F407Z.211@3505.58,2048.56 ; NMOS5.2@3480.5,1979 cw(c3510.68,1979) 3489.34,2000.34 ; 3733,1350 3740,1357 ; v1@3806.19,2423.24 cw(c3777.96,2389.44) CAN_AX_EEPROM.11@3822,2389.44 ; v1@3809.28,2421.7 cw(c3802.63,2393.49) CAN_AX_EEPROM.11@3827.73,2407.98 ; CAN_AX_EEPROM.11@3811.32,2403.06 ccw(c3797.87,2415.87) v1(3811,2429) 3822,2418 ; v1@3811.85,2421.55 cw(c3813.24,2409.25) 3822,2418 ; v1@3811.99,2421.57 cw(c3813.45,2410.61) 3823.02,2416.14 ; CAN_AX_EEPROM.11@3815.18,2406.11 ccw(c3808.24,2418) 3822,2418 ; v1@3818.45,2428.15 ccw(c3830.75,2426.76) 3822,2418 ; 3821.87,2418.13 cw(c3809.01,2405.26) CAN_AX_EEPROM.11@3822.19,2392.72 ; CAN_AX_EEPROM.11@3822,2391 3822,2418 ; CAN_AX_EEPROM.11@3829.5,2407.61 cw(c3832.94,2418) 3822,2418 ; 4318,1350 4321,1353 ; 4643,1352 4650.57,1359.57 ; MPUMOS.2@4667.58,3292.42 ccw(c4649.65,3310.35) 4675,3310.35 ccw(c4700.35,3310.35) MPUMOS.2@4682.42,3292.42 ; MPUMOS.2@4675,3285 4675,3358 4695,3378 4788,3378 4811,3355 4811,3056 4855,3012 5133.79,3012 5143,3002.79 SWD.2@5193,3002.79 ; RB_10K_1.1@4700.63,4156.37 ccw(c4670.75,4186.25) 4713,4186.25 ccw(c4755.25,4186.25) RB_10K_1.1@4725.37,4156.37 ; NMOS0.2@4705.58,4217.58 cw(c4687.65,4199.65) 4713,4199.65 cw(c4738.35,4199.65) NMOS0.2@4720.42,4217.58 ; RB_10K_1.1@4709.16,4152.84 cw(c4736.44,4125.56) RB_10K_1.1@4736.44,4164.14 ; NMOS0.2@4713,4225 RB_10K_1.1@4713,4144 4733.14,4164.14 MDE_STM32F407Z.215@4890,4164.14 ; RB_10K_1.1@4719.77,4142.23 cw(c4772.65,4089.35) 4772.65,4164.14 ; RB_10K_1.1@4730.37,4131.63 cw(c4808.87,4053.13) 4808.87,4164.14 ; MDE_STM32F407Z.215@4874.42,4148.56 ccw(c4836.82,4110.96) 4836.82,4164.14 ccw(c4836.82,4217.32) MDE_STM32F407Z.215@4874.42,4179.71 ; 5042,1352 5043,1353 ; HF_IMU.1@5175,4311 5187,4311 HF_IMU.1@5193,4317 ; 5319.07,4120.57 5328.5,4130 ; 5322.43,2372.57 5330,2365 ; 5323.5,3816 5328.5,3821 ; 5324,2569 5330,2563 ; 5325.93,3390.57 5328.5,3388 ; 5326.5,3783 5328.5,3781 ; 5328,2036 5330,2034 ; 5328.21,3002.79 5330,3001 ; 5328.57,1643.57 5330,1645
  Top Layer w20: 3060,2701 3073,2688 SPI1.1@3199,2688 ; 3060,3090 3069.57,3080.43 SPI1.9@3199,3080.43 ; 3060,3411 3067,3404 UART2.1@3199,3404 ; 3060,3601 3060.57,3600.43 UART2.5@3199,3600.43 ; 3060,3929 3062,3927 UART4.1@3199,3927 ; 3060,4132 3068.57,4123.43 UART4.5@3199,4123.43 3252.43,4123.43 3296.43,4167.43 3486.71,4167.43 MDE_STM32F407Z.206@3490,4164.14 ; 3061,2164 IIC.1@3199,2164 ; 3066.57,2360.43 IIC.5@3199,2360.43 ; pad.1@3116,4747 3275,4747 3321,4701 Battery_In1.2@3321,4592.54 ; pad.1@3136.55,4726.45 cw(c3186.15,4676.85) 3186.15,4747 cw(c3186.15,4817.15) pad.1@3136.55,4767.55 ; pad.1@3150.69,4712.31 cw(c3234.43,4628.57) 3234.43,4747 cw(c3234.43,4865.43) pad.1@3150.69,4781.69 ; Battery_In1.2@3293.27,4620.26 ccw(c3226.33,4687.2) 3321,4687.2 ccw(c3415.67,4687.2) Battery_In1.2@3348.73,4620.26 ; 3334.92,4167.43 cw(c3334.92,4109.06) MDE_STM32F407Z.208@3376.19,4150.33 ; 3347.57,1358.57 motor1.9@3347.57,1488 ; 3350.79,4167.43 ccw(c3350.79,4203.34) MDE_STM32F407Z.208@3376.19,4177.95 ; MDE_STM32F407Z.208@3403.81,4150.33 cw(c3445.08,4109.06) 3445.08,4167.43 ; MDE_STM32F407Z.208@3403.81,4177.95 ccw(c3429.21,4203.34) 3429.21,4167.43 ; 3434.92,4167.43 cw(c3434.92,4109.06) MDE_STM32F407Z.206@3476.19,4150.33 ; 3450.79,4167.43 ccw(c3450.79,4203.34) MDE_STM32F407Z.206@3476.19,4177.95 ; 3740,1357 motor1.1@3740,1488 ; 4650.57,1359.57 motor2.9@4650.57,1488 ; MDE_STM32F407Z.212@4890,2064.14 MDE_STM32F407Z.213@4990,2064.14 5018.14,2036 ; MDE_STM32F407Z.215@4890,4164.14 MDE_STM32F407Z.214@4990,4164.14 5033.56,4120.57 HF_IMU.5@5193,4120.57 ; MDE_STM32F407Z.212@4903.81,2050.33 cw(c4937.14,2016.99) 4937.14,2064.14 cw(c4937.14,2111.28) MDE_STM32F407Z.212@4903.81,2077.95 ; MDE_STM32F407Z.215@4903.81,4150.33 cw(c4937.14,4116.99) 4937.14,4164.14 cw(c4937.14,4211.28) MDE_STM32F407Z.215@4903.81,4177.95 ; MDE_STM32F407Z.213@4976.19,2050.33 ccw(c4942.86,2016.99) 4942.86,2064.14 ccw(c4942.86,2111.28) MDE_STM32F407Z.213@4976.19,2077.95 ; MDE_STM32F407Z.214@4976.19,4150.33 ccw(c4942.86,4116.99) 4942.86,4164.14 ccw(c4942.86,4211.28) MDE_STM32F407Z.214@4976.19,4177.95 ; MDE_STM32F407Z.214@4990,4144.61 cw(c4990,4097.47) 5023.34,4130.8 cw(c5056.67,4164.14) MDE_STM32F407Z.214@5009.53,4164.14 ; MDE_STM32F407Z.213@4992.47,2044.77 cw(c4996.37,2014.24) 5018.14,2036 ; MDE_STM32F407Z.213@5009.37,2061.66 ccw(c5039.9,2057.76) 5018.14,2036 ; 5043,1353 motor2.1@5043,1488 ; motor3.9@5193,1643.57 5328.57,1643.57 ; motor3.1@5193,2036 5018.14,2036 ; USART6.5@5193,2372.57 5322.43,2372.57 ; USART6.1@5193,2569 5324,2569 ; SWD.2@5193,3002.79 5328.21,3002.79 ; Terminal.9@5193,3390.57 5325.93,3390.57 ; Terminal.1@5193,3783 5326.5,3783 ; HF_IMU.1@5193,4317 5327.5,4317 5328.5,4318 ; motor3.1@5201,2036 5328,2036 ; HF_IMU.5@5201,4120.57 5319.07,4120.57
  Top Layer w25: 4321,1353 GPS.1@4321,1488
  Top Layer w50: 3060,2113.61 ccw(c3122.87,2113.61) IIC.6@3078.41,2069.16 ; 3060,2410.81 cw(c3122.87,2410.81) IIC.7@3078.41,2455.26 ; 3060,2520.04 ccw(c3122.87,2520.04) IIC.7@3078.41,2475.59 ; 3060,2528.39 cw(c3122.87,2528.39) SPI1.10@3078.41,2572.84 ; 3060,2637.61 ccw(c3122.87,2637.61) SPI1.10@3078.41,2593.16 ; 3060,3130.81 cw(c3122.87,3130.81) SPI1.11@3078.41,3175.26 ; 3060,3240.04 ccw(c3122.87,3240.04) SPI1.11@3078.41,3195.59 ; 3060,3244.39 cw(c3122.87,3244.39) UART2.6@3078.41,3288.84 ; 3060,3353.61 ccw(c3122.87,3353.61) UART2.6@3078.41,3309.16 ; 3060,3650.81 cw(c3122.87,3650.81) UART2.7@3078.41,3695.26 ; 3060,3760.04 ccw(c3122.87,3760.04) UART2.7@3078.41,3715.59 ; 3060,3767.39 cw(c3122.87,3767.39) UART4.6@3078.41,3811.84 ; 3060,3876.61 ccw(c3122.87,3876.61) UART4.6@3078.41,3832.16 ; 3060,4173.81 cw(c3122.87,4173.81) UART4.7@3078.41,4218.26 ; SERVO.3@3066,4588.85 3069.69,4592.54 Battery_In1.2@3321,4592.54 ; UART4.7@3084,4228.43 3060,4204.43 3060,4132 3060,3929 3060,3601 3060,3411 3060,3090 3060,2701 3060,2367 3060,2165 3060,2083 IIC.6@3084,2059 3133,2059 3160,2032 ; IIC.6@3089.59,2048.84 cw(c2919.59,1878.85) 3160,1878.85 ; IIC.6@3104.21,2045.34 cw(c3121.24,1993.25) 3160,2032 ; pad.4@3116,1405 3230,1405 3240,1395 3240,1470 3160,1550 3160,1812 3160,2032 ; IIC.6@3124.94,2084.19 cw(c3040.3,1999.56) 3160,1999.56 ; pad.4@3140.08,1380.92 cw(c3198.22,1322.78) 3198.22,1405 cw(c3198.22,1487.22) pad.4@3140.08,1429.08 ; pad.4@3168.65,1405 cw(c3168.65,1314.82) motor1.11@3232.41,1378.59 ; 3240,1429.66 ccw(c3283.48,1429.66) motor1.11@3252.74,1398.91 ; motor1.11@3242.57,1373 3265.57,1350 3339,1350 3733,1350 4318,1350 4403,1350 GPS.7@4426,1373 4451,1348 4520.57,1348 motor2.11@4545.57,1373 ; motor1.11@3252.74,1367.41 ccw(c3294.78,1409.45) 3294.78,1350 ; Battery_In1.2@3303.88,4575.41 ccw(c3262.55,4534.08) 3262.55,4592.54 ccw(c3262.55,4650.99) Battery_In1.2@3303.88,4609.66 ; 3792.8,1350 ccw(c3792.8,1409.45) motor1.10@3834.84,1367.41 ; motor1.10@3855.16,1367.41 ccw(c3897.2,1409.45) 3897.2,1350 ; 3918.37,1350 ccw(c3918.37,1409.45) GPS.8@3960.41,1367.41 ; SERVO3.6@3930.8,1646.8 cw(c3834.77,1550.77) 3970.57,1550.77 ; SERVO3.6@3932.98,1645.59 cw(c3922.01,1598.28) 3970.57,1598.28 ; SERVO3.6@3934,1650 3970.57,1613.43 GPS.8@3970.57,1373 ; GPS.8@3980.74,1367.41 ccw(c4022.78,1409.45) 4022.78,1350 ; 4373.8,1350 ccw(c4373.8,1409.45) GPS.7@4415.84,1367.41 ; GPS.7@4436.16,1367.41 ccw(c4483.03,1414.28) 4483.03,1348 ; 4488.55,1348 ccw(c4488.55,1414.28) motor2.11@4535.41,1367.41 ; SERVO2.3@4530.8,1646.8 cw(c4495.13,1611.13) 4545.57,1611.13 ; SERVO2.3@4534,1650 4545.57,1638.43 motor2.11@4545.57,1373 ; motor2.11@4555.74,1367.41 ccw(c4592.95,1404.62) 4592.95,1352 ; 5100.63,1352 ccw(c5100.63,1404.62) motor2.10@5137.84,1367.41 ; motor2.10@5137.84,1398.91 ccw(c5065.02,1471.72) 5168,1471.72 ; pad.2@5251.92,4722.92 cw(c5102.04,4573.04) 5314,4573.04 ; pad.3@5255.33,1432.06 ccw(c5173.99,1538.57) motor3.11@5308,1538.57 ; pad.3@5276,1405 5308,1437 motor3.11@5308,1538.57 ; pad.2@5276,4747 5314,4709 5314,4428 HF_IMU.6@5308,4422 HF_IMU.6@5300,4414 ; motor3.11@5281.72,1548.35 cw(c5203,1621.36) 5203,1514 ; pad.2@5287.27,4758.27 cw(c5222.75,4693.75) 5314,4693.75 ; HF_IMU.6@5297.84,4432.16 ccw(c5258.82,4471.18) 5314,4471.18 ; HF_IMU.6@5303,4437 5328.5,4411.5 5328.5,4318 5328.5,4130 5328.5,3821 5328.5,3781 5328.5,3388 5328.5,3306.07 Terminal.11@5308,3285.57 5330,3263.57 5330,3001 5330,2563 5330,2365 5330,2034 5330,1645 5330,1560.57 motor3.11@5308,1538.57 ; motor3.11@5313.59,1548.74 ccw(c5273.96,1588.36) 5330,1588.36 ; motor3.10@5313.59,2130.84 cw(c5273.96,2091.21) 5330,2091.21 ; motor3.10@5313.59,2151.16 ccw(c5273.96,2190.79) 5330,2190.79 ; USART6.7@5313.59,2257.41 cw(c5273.96,2217.79) 5330,2217.79 ; USART6.7@5313.59,2277.74 ccw(c5273.96,2317.36) 5330,2317.36 ; USART6.6@5313.59,2663.84 cw(c5273.96,2624.21) 5330,2624.21 ; USART6.6@5313.59,2684.16 ccw(c5273.96,2723.79) 5330,2723.79 ; SWD.6@5313.59,2789.2 cw(c5273.96,2749.58) 5330,2749.58 ; SWD.6@5313.59,2809.52 ccw(c5273.96,2849.15) 5330,2849.15 ; SWD.5@5313.59,3146.84 cw(c5273.96,3107.21) 5330,3107.21 ; SWD.5@5313.59,3167.16 ccw(c5273.96,3206.79) 5330,3206.79 ; Terminal.11@5313.59,3275.41 cw(c5273.96,3235.79) 5330,3235.79 ; Terminal.11@5313.59,3295.74 ccw(c5277.58,3331.74) 5328.5,3331.74 ; Terminal.10@5313.59,3877.84 cw(c5277.58,3841.84) 5328.5,3841.84 ; Terminal.10@5313.59,3898.16 ccw(c5277.58,3934.16) 5328.5,3934.16 ; HF_IMU.7@5313.59,4005.41 cw(c5277.58,3969.41) 5328.5,3969.41 ; HF_IMU.7@5313.59,4025.74 ccw(c5277.58,4061.74) 5328.5,4061.74 ; HF_IMU.6@5313.59,4411.84 cw(c5277.58,4375.84) 5328.5,4375.84 ; motor2.11@4545.57,1373 4566.57,1352 4643,1352 5042,1352 5127,1352 motor2.10@5148,1373 5168,1393 5168,1479 5203,1514 ; 5203,1514 5283.43,1514 motor3.11@5308,1538.57
  Top Layer w80: SERVO3.12@3694,1650 SERVO3.9@3814,1650 SERVO3.6@3934,1650 SERVO3.3@4054,1650 SERVO2.12@4174,1650 SERVO2.9@4294,1650 SERVO2.6@4414,1650 SERVO2.3@4534,1650 SERVO1.12@4654,1650 SERVO1.9@4774,1650 SERVO1.6@4894,1650 SERVO1.3@5014,1650
  Top Layer w100: Battery_In1.2@3321,4591.54 Battery_In2.2@3552,4591.54 ; Battery_In2.2@3552,4592.54 3693.54,4592.54 3708,4607 3708,4687 MDE_POWER.5@3708,4767
  Bottom Layer w15: MDE_STM32F407Z.208@3375.95,4181.1 ccw(c3351.17,4211) 3390,4211 ; MDE_STM32F407Z.208@3390,4164.14 3390,4211 ; MDE_STM32F407Z.208@3404.05,4181.1 cw(c3428.83,4211) 3390,4211 ; v1@3805.7,2434.3 ccw(c3792.89,2447.11) 3811,2447.11 ccw(c3829.11,2447.11) v1@3816.3,2434.3 ; v1(3811,2429) 3811,2531 3907,2627 3907,3260 3931,3284 3931,4016 3943,4028 3943,4204 3947,4208 3909,4246 3425,4246 3390,4211
  Bottom Layer w30: CP2102USB.5@4653.75,4095.75 cw(c4628.99,4070.99) 4664,4070.99 cw(c4699.01,4070.99) CP2102USB.5@4674.25,4095.75 ; CP2102USB.5@4664,4106 4664,4038 4682,4020 4811,4020 4832,4041 4832,4106.14 MDE_STM32F407Z.215@4890,4164.14 ; MDE_STM32F407Z.215@4875.47,4164.14 cw(c4840.4,4164.14) 4865.2,4139.34 cw(c4890,4114.54) MDE_STM32F407Z.215@4890,4149.61
  Bottom Layer w50: Battery_In2.2@3550,4591.54 3643.46,4591.54 3782,4453 4325,4453 4660,4788 5235,4788 pad.2@5276,4747 ; Battery_In2.2@3569.12,4575.41 cw(c3608.04,4536.5) 3608.04,4591.54 ; Battery_In2.2@3569.12,4609.66 ccw(c3612.87,4653.4) 3612.87,4591.54 ; 5094.8,4788 cw(c5094.8,4565.8) pad.2@5251.92,4722.92 ; 5215.51,4788 cw(c5215.51,4686.51) pad.2@5287.27,4758.27
  Bottom Layer w100: Battery_In1.2@3319,4591.54 Battery_In2.2@3550,4591.54
I2C1_SCL: IMU.3 MDE_STM32F407Z.136 | length 2336.3
  Top Layer w6: IMU.3@4045.26,3247.74 ccw(c4000.02,3292.98) 4064,3292.98 ccw(c4127.98,3292.98) IMU.3@4082.74,3247.74 ; IMU.3@4049.5,3243.5 ccw(c4014.51,3278.49) 4064,3278.49 ccw(c4113.49,3278.49) IMU.3@4078.5,3243.5 ; IMU.3@4053.75,3239.25 ccw(c4028.99,3264.01) 4064,3264.01 ccw(c4099.01,3264.01) IMU.3@4074.25,3239.25 ; v1@4055.73,3299.38 cw(c4034.38,3281.83) 4061.71,3277.73 ; v1@4056.51,3298.51 cw(c4038.44,3280.44) 4064,3280.44 ; v1@4057.87,3297.35 cw(c4046.87,3282.48) 4065.16,3285.22 ; v1@4060.37,3303.19 cw(c4048.41,3293.36) 4063.71,3291.07 ; 4062.17,3280.79 cw(c4087.14,3277.05) v1@4072.13,3297.35 ; 4064,3275.62 cw(c4096.38,3275.62) v1@4073.49,3298.51 ; 4064,3290.1 cw(c4081.9,3290.1) v1@4069.24,3302.76 ; v1(4065,3307) 4064,3306 IMU.3@4064,3229 IMU.3@4077,3242 ; 4065.33,3284.1 cw(c4077.82,3285.97) v1@4071.25,3296.75 ; v1@4168.24,3915.24 ccw(c4192.97,3939.97) 4192.97,3905 ; v1@4172.49,3902.51 cw(c4178.49,3896.51) 4178.49,3905 cw(c4178.49,3925.49) v1(4164,3911) 4170,3905 4949.14,3905 ; v1@4172.49,3919.49 ccw(c4207.46,3954.46) 4207.46,3905 ; MDE_STM32F407Z.136@4963.55,3866.13 ccw(c4914.02,3869.87) 4949.14,3905 ; MDE_STM32F407Z.136@4969.53,3865.68 ccw(c4931.2,3868.58) 4958.38,3895.76 ccw(c4985.56,3922.94) MDE_STM32F407Z.136@4988.45,3884.61 ; MDE_STM32F407Z.136@4975.51,3865.23 ccw(c4948.39,3867.28) 4967.62,3886.51 ccw(c4986.86,3905.75) MDE_STM32F407Z.136@4988.91,3878.62 ; MDE_STM32F407Z.136@4988,3890.59 cw(c4984.26,3940.12) 4949.14,3905 ; MDE_STM32F407Z.136@4990,3864.14 4949.14,3905
  Bottom Layer w6: v1(4065,3307) 4126,3368 4126,3894 4143,3911 ; v1@4065,3319 ccw(c4065,3347.97) 4085.49,3327.49 ccw(c4105.97,3307) v1@4077,3307 ; v1@4153.66,3904.91 ccw(c4143,3898.63) 4143,3911 ; v1@4153.66,3917.09 cw(c4143,3923.37) 4143,3911 ; v1(4164,3911) 4143,3911
I2C1_SDA: IMU.4 MDE_STM32F407Z.137 | length 2113.1
  Top Layer w6: IMU.4@4145.26,3247.74 ccw(c4100.02,3292.98) 4164,3292.98 ccw(c4227.98,3292.98) IMU.4@4182.74,3247.74 ; IMU.4@4149.5,3243.5 ccw(c4114.51,3278.49) 4164,3278.49 ccw(c4213.49,3278.49) IMU.4@4178.5,3243.5 ; IMU.4@4153.75,3239.25 ccw(c4128.99,3264.01) 4164,3264.01 ccw(c4199.01,3264.01) IMU.4@4174.25,3239.25 ; v1@4156.35,3299.87 cw(c4132.77,3282.44) 4161.77,3278.09 ; v1@4157.51,3298.51 cw(c4141.86,3282.86) 4164,3282.86 ; v1@4158.87,3297.35 cw(c4149.88,3285.19) 4164.83,3287.44 ; 4161.84,3278.58 cw(c4190.15,3274.33) v1@4173.13,3297.35 ; IMU.4@4164,3229 4164,3305 v1(4166,3307) ; 4164,3273.2 cw(c4199.8,3273.2) v1@4174.49,3298.51 ; 4164,3287.69 cw(c4185.31,3287.69) v1@4170.24,3302.76 ; v1(4164,3864.14) MDE_STM32F407Z.137@4890,3864.14 ; 4164.85,3287.29 cw(c4172.42,3288.42) v1@4169.92,3295.66 ; v1@4172.49,3855.65 cw(c4192.97,3835.17) 4192.97,3864.14 cw(c4192.97,3893.11) v1@4172.49,3872.62 ; MDE_STM32F407Z.137@4871.24,3845.38 ccw(c4825.96,3800.09) 4825.96,3864.14 ccw(c4825.96,3928.18) MDE_STM32F407Z.137@4871.24,3882.9 ; MDE_STM32F407Z.137@4875.48,3849.62 ccw(c4840.44,3814.58) 4840.44,3864.14 ccw(c4840.44,3913.7) MDE_STM32F407Z.137@4875.48,3878.65 ; MDE_STM32F407Z.137@4879.73,3853.87 ccw(c4854.93,3829.07) 4854.93,3864.14 ccw(c4854.93,3899.21) MDE_STM32F407Z.137@4879.73,3874.41
  Bottom Layer w6: v1@4155.51,3855.65 cw(c4135.03,3835.17) 4164,3835.17 cw(c4192.97,3835.17) v1@4172.49,3855.65 ; v1@4157.51,3315.49 ccw(c4141.86,3331.14) 4164,3331.14 ; 4164,3326.31 ccw(c4185.31,3326.31) v1@4170.24,3311.24 ; 4164,3340.8 ccw(c4199.8,3340.8) v1@4174.49,3315.49 ; v1(4164,3864.14) 4164,3309 v1(4166,3307)